# EAGLE board MySens-easyRS485-Maple-V01-008 (EAGLE 7.6.0)
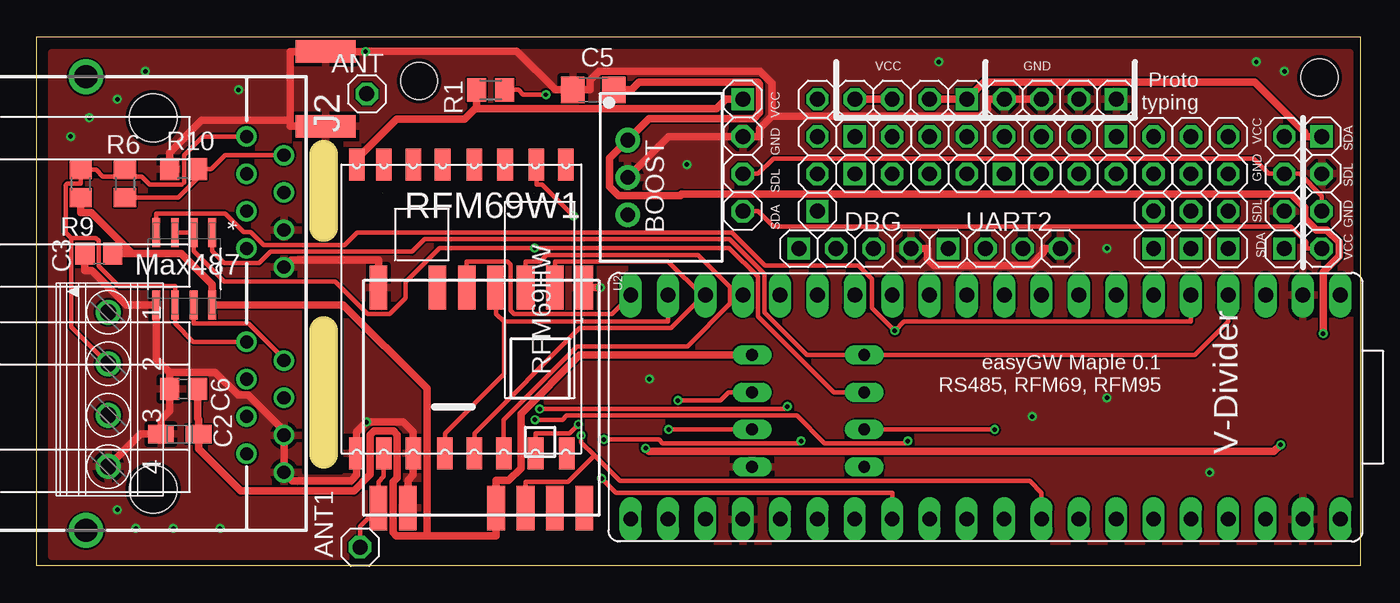
[diagram p0: board, top side]
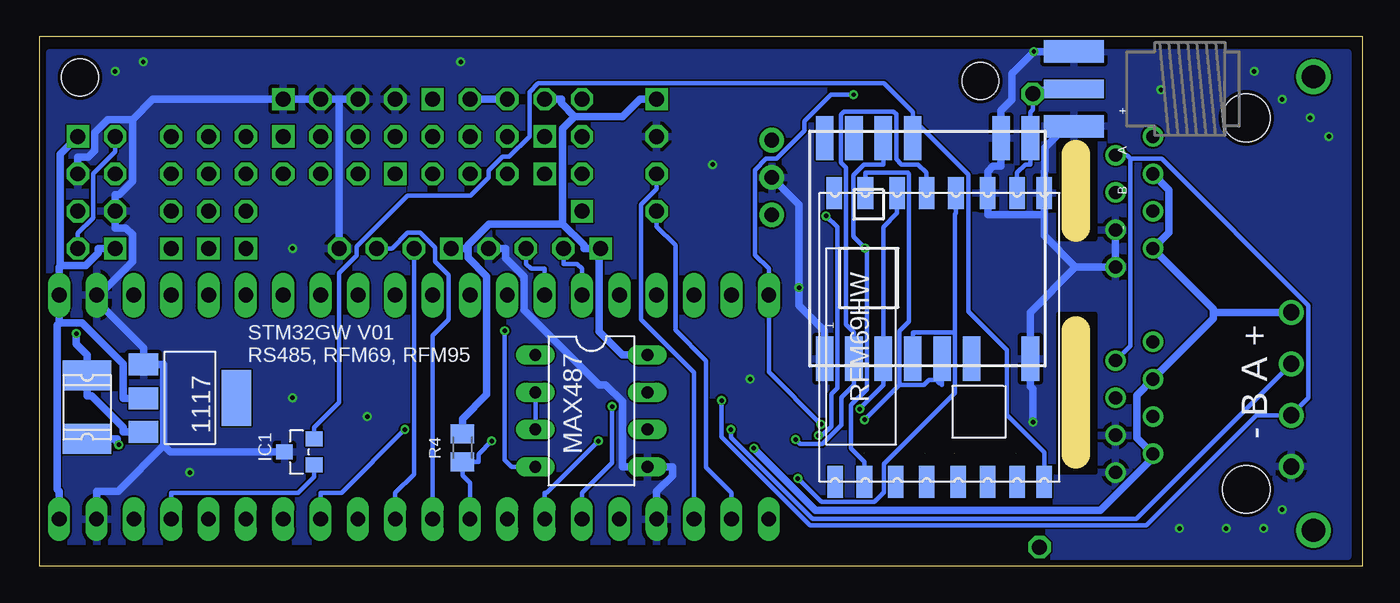
[diagram p1: board, bottom side, seen from below]

Size 90 x 36 mm. Coordinates in mm from the lower left corner, seen from the top.
Outline: 90,0 0,0 0,36 90,36 90,0
Copper layers (1*16): Top 0.035mm / dielectric 1.5mm / Bottom 0.035mm
Design rules "dirt_cheap_dirty_boards.v1": minimum track width 5mil, minimum drill 12mil, track to track 5mil, track to pad 5mil, pad to pad 5mil, via to via 5mil, smd to smd 0mil, copper to edge 10mil, drill to drill 10mil, minimum pad ring 10mil, minimum via ring 6mil, stop-mask expansion 2mil, vias tented up to drill 25mil, thermal gap 10mil
Net classes: 0 default: width 0.305 mm; 1 Power: width 0.508 mm
Holes 2.5 mm at 87.24,33.23 26,33
tRestrict: area 18.2,22.2 to 20.7,28.6; area 18.2,6.3 to 20.7,17.1; area 23.9,0.6 to 89.9,1.3; 1 lines
bRestrict: area 18.2,22.2 to 20.7,28.6; area 18.2,6.3 to 20.7,17.1; area 23.9,0.6 to 89.9,1.3
Milling: 2 lines

## Footprints (pad centres in the part's own frame; a part is rotated, then mirrored left to right if it is on the bottom)
SOT223 = smd 1.499 x 2.007: 1 -2.261,-3.15; 2 0.025,-3.15; 3 2.311,-3.15 | smd 3.81 x 2.007: 4 0,3.15
1X01 = drill 1.016 octagon: 1 0,0
SIP3 = drill 1 pad 1.676: 1 -2.54,0; 2 0,0; 3 2.54,0
R/2012-12W = smd 1.75 x 1.26: + 1.275,0; - -1.275,0
C0805 = smd 1.3 x 1.5: 1 -0.95,0; 2 0.95,0
C1206 = smd 1.6 x 1.8: 1 -1.4,0; 2 1.4,0
1X04-S = drill 1.016 square: 1 -3.81,0 | drill 1.016 octagon: 2 -1.27,0; 3 1.27,0; 4 3.81,0
1812L = smd 2.03 x 3.3: P$1 -2.16,0; P$2 2.16,0
SOT23 = smd 1.016 x 1.143: 1 -0.889,-1.016; 2 0.889,-1.016; 3 0,1.016
557570-1 = drill 0.889: 1-1 -11.43,6.35; 1-2 -10.16,8.89; 1-3 -8.89,6.35; 1-4 -7.62,8.89; 1-5 -6.35,6.35; 1-6 -5.08,8.89; 1-7 -3.81,6.35; 1-8 -2.54,8.89; 2-1 2.54,6.35; 2-2 3.81,8.89; 2-3 5.08,6.35; 2-4 6.35,8.89; 2-5 7.62,6.35; 2-6 8.89,8.89; 2-7 10.16,6.35; 2-8 11.43,8.89 | drill 1.575 pad 2.184: G1 -15.494,-4.572; G3 15.367,-4.572 | hole 3.251: -12.7,0; 12.573,0
DIL08 = drill 0.813 long: 1 -3.81,-3.81; 2 -1.27,-3.81; 3 1.27,-3.81; 4 3.81,-3.81; 5 3.81,3.81; 6 1.27,3.81; 7 -1.27,3.81; 8 -3.81,3.81
M0805 = smd 1.3 x 1.6: 1 -0.95,0; 2 0.95,0
R0805 = smd 1.3 x 1.5: 1 -0.95,0; 2 0.95,0
RFM = smd 2.184 x 1.067: ANT 19.651,2.889; DIO0 0,13.27; DIO1 0,11.143; DIO2 0,9.047; DIO3 0,6.889; DIO4 0,4.889; DIO5 0,2.889; GNDA 19.651,4.889; GNDB 19.651,1.048; MISO 19.651,9.047; MOSI 19.651,11.047; NC 19.651,15.334; NSS 19.651,13.206; RESET 0,15.27; SCK 19.651,7.048; VCC 0,1.048
SOIC127P600X175-8N = smd 1.981 x 0.533: 1 -2.464,1.905; 2 -2.464,0.635; 3 -2.464,-0.635; 4 -2.464,-1.905; 5 2.464,-1.905; 6 2.464,-0.635; 7 2.464,0.635; 8 2.464,1.905
RFM69HCW-XXXS2 = smd 3 x 1.2: 3.3V 7.5,1; ANT 7.5,-7; DIO0 7.5,3; DIO1 7.5,5; DIO2 7.5,7; GND_1 7.5,-5; GND_2 -7.5,-7; GND_3 -7.5,7; MISO -7.5,5; MOSI -7.5,3; NSS -7.5,-1; RESET -7.5,-3; SCK -7.5,1
20-DIP = drill 1.016 pad 1.27 long: 1 -24.13,-7.62; 2 -21.59,-7.62; 3 -19.05,-7.62; 4 -16.51,-7.62; 5 -13.97,-7.62; 6 -11.43,-7.62; 7 -8.89,-7.62; 8 -6.35,-7.62; 9 -3.81,-7.62; 10 -1.27,-7.62; 11 1.27,-7.62; 12 3.81,-7.62; 13 6.35,-7.62; 14 8.89,-7.62; 15 11.43,-7.62; 16 13.97,-7.62; 17 16.51,-7.62; 18 19.05,-7.62; 19 21.59,-7.62; 20 24.13,-7.62 | drill 1 pad 1.27 long: 21 24.13,7.62; 22 21.59,7.62; 23 19.05,7.62; 24 16.51,7.62; 25 13.97,7.62; 26 11.43,7.62; 27 8.89,7.62; 28 6.35,7.62; 29 3.81,7.62; 30 1.27,7.62; 31 -1.27,7.62; 32 -3.81,7.62; 33 -6.35,7.62; 34 -8.89,7.62; 35 -11.43,7.62; 36 -13.97,7.62; 37 -16.51,7.62; 38 -19.05,7.62; 39 -21.59,7.62; 40 -24.13,7.62
SMA_EDGELAUNCH = smd 4.064 x 1.524: GND@1 2.032,-2.54; GND@2 2.032,2.54 | smd 4.064 x 1.524 bottom: GND@3 2.032,2.54; GND@4 2.032,-2.54 | smd 4.064 x 1.27: P 2.032,0
1751264 = drill 1.1 pad 1.7: 1 -5.25,-0.1; 2 -1.75,-0.1; 3 1.75,-0.1; 4 5.25,-0.1

## Placement (x,y rotation side)
1117  REG1117  [SOT223]  79.77,11.43 270 bottom
ANT  [1X01]  22.45,32.12 0 top
ANT1  [1X01]  21.98,1.27 0 top
BOOST  R-78C1.8-1.0  [SIP3]  40.19,26.43 270 top
C2  10uF  [R/2012-12W]  9.73,8.96 0 top
C3  22p  [C0805]  4.22,21.23 0 top
C5  0.1uF  [C1206]  37.86,32.38 180 top
C6  22pF  [C0805]  9.98,12.04 180 top
DBG  [1X04-S]  55.64,21.59 0 top
F1  1812L  [1812L]  86.75,10.79 90 bottom
IC1  ATSHA204A  [SOT23]  72.33,7.75 90 bottom
J2  [557570-1]  7.92,17.78 270 top
JP1  [1X04-S]  69.61,31.75 180 top
JP2  [1X04-S]  84.85,25.4 90 top
JP3  [1X04-S]  59.45,31.75 180 top
JP4  [1X04-S]  69.61,29.21 180 top
JP5  [1X04-S]  48.02,27.94 270 top
JP6  [1X04-S]  59.45,26.67 0 top
JP7  [1X04-S]  69.61,26.67 0 top
JP8  [1X04-S]  75.96,25.4 90 top
JP9  [1X04-S]  78.5,25.4 90 top
JP10  [1X04-S]  87.39,25.4 270 top
JP11  [1X04-S]  53.1,27.94 90 top
JP12  [1X04-S]  81.04,25.4 90 top
JP15  [1X04-S]  59.45,29.21 0 top
MAX487  MAX481CPA  [DIL08]  52.47,10.54 270 bottom
R1  10k  [M0805]  30.88,32.38 180 top
R4  10k  [M0805]  61.23,8.03 90 bottom
R6  150R  [R0805]  6,26 270 top
R9  330R  [R0805]  3,26 90 top
R10  330R  [R0805]  10,27 180 top
RFM69W  RFM69HW  [RFM]  20.62,5.71 90 bottom
RFM69W1  RFM69HW  [RFM]  20.71,27.3 270 top
RS1  MAX487ECSA+  [SOIC127P600X175-8N]  10.04,20.22 270 top
U1  RFM69HCW  [RFM69HCW-XXXS2]  29.61,21.59 90 bottom
U2  RFM69HCW  [RFM69HCW-XXXS2]  30.24,11.43 270 top
U$2  MAPLEMINI  [20-DIP]  64.53,10.79 180 top
UART2  [1X04-S]  65.8,21.59 0 top
X2  [SMA_EDGELAUNCH]  17.62,32.45 180 bottom
X3  1751264  [1751264]  4.96,12 270 top

## Library data of the parts
1117 = burr-brown; MPN: REG1117; OC_FARNELL: 1097566; OC_NEWARK: 14P6981
ANT ANT1 = pinhead
BOOST = dc-dc-converter
C2 C3 C5 C6 R1 R4 R6 R9 R10 = rcl
DBG JP1-JP12 JP15 UART2 = pinhead-2
F1 = ptc-littlefuse
IC1 = Sensor
J2 = con-amp
MAX487 = maxim-4
RFM69W RFM69W1 = hoperf
RS1 = Maxim_By_element14_Batch_1; MPN: MAX487ECSA+; OC_FARNELL: 9724532; OC_NEWARK: 68K4803; PACKAGE: SOIC-8; SUPPLIER: Maxim
U1 U2 = doug
U$2 = maplemini-small
X2 = adafruit
X3 = con-phoenix-350; MPN: 1751264; OC_FARNELL: unknown; OC_NEWARK: 10R0934

## Nets
3V3: IC1.2 RFM69W.VCC U1.3.3V
+5V [Power]: U$2.21
A: J2.1-1 J2.2-1 MAX487.6 R6.1 R9.2 RS1.6 X3.2
ANT: ANT.1 RFM69W.ANT U1.ANT X2.P
ANT1: ANT1.1 RFM69W1.ANT U2.ANT
B: J2.1-2 J2.2-2 MAX487.7 R6.2 R10.1 RS1.7 X3.3
B6_TX: MAX487.4 RS1.4 U$2.5
B7_RX: MAX487.1 RS1.1 U$2.4
CC_CS1: U$2.35
CC_CS3: U$2.25
CC_IN_1: U$2.7
CC_OUT_1: U$2.6
CC_OUT_2: U$2.36
CSN: R4.1 RFM69W.NSS U1.NSS U$2.29
CSN2: R1.1 RFM69W1.NSS U2.NSS U$2.20
GND [Power]: 1117.1 BOOST.2 C2.- C3.1 C5.2 C6.2 DBG.4 IC1.3 J2.1-6 J2.1-8 J2.2-6 J2.2-8 JP1.1 JP1.2 JP1.3 JP1.4 JP2.2 JP5.2 JP10.2 MAX487.5 R10.2 RFM69W1.GNDA RFM69W1.GNDB RFM69W.GNDA RFM69W.GNDB RS1.5 U1.GND_1 U1.GND_2 U1.GND_3 U2.GND_1 U2.GND_2 U2.GND_3 U$2.2 U$2.24 U$2.39 UART2.4 X2.GND@1 X2.GND@2 X2.GND@3 X2.GND@4 X3.4
IN [Power]: F1.P$1 J2.1-3 J2.1-7 J2.2-3 J2.2-7 X3.1
IRQ: MAX487.2 MAX487.3 RFM69W.DIO0 RS1.2 RS1.3 U1.DIO0 U$2.33
IRQ2: RFM69W1.DIO0 U2.DIO0 U$2.32
MISO: RFM69W.MISO U1.MISO U$2.27
MISO2: RFM69W1.MISO U2.MISO U$2.18
MOSI: RFM69W.MOSI U1.MOSI U$2.26
MOSI2: RFM69W1.MOSI U2.MOSI U$2.17
N$1: U1.RESET
N$2: J2.1-4
N$3: J2.1-5
N$4: U2.DIO2
N$6: J2.2-4
N$7: J2.2-5
N$8: U2.DIO1
N$9: U2.RESET
N$14: U1.DIO2
N$15: U1.DIO1
NRESET: U$2.34
OUT [Power]: BOOST.3
PC13: IC1.1 U$2.37
RX-MAPLE: U$2.30 UART2.3
RX_DBG: DBG.3 U$2.14
SCK: RFM69W.SCK U1.SCK U$2.28
SCK2: RFM69W1.SCK U2.SCK U$2.19
SCL: JP2.3 JP5.3 JP10.3 U$2.23
SDA: JP2.4 JP5.4 JP10.4 U$2.22
SWCLK/TCK: U$2.10
SWDIO/TMS: U$2.11
SWO/TDO: U$2.8
TDI: U$2.9
TX-MAPLE: U$2.31 UART2.2
TX_DBG: DBG.2 U$2.15
VCC [Power]: 1117.2 C2.+ C3.2 C6.1 DBG.1 JP2.1 JP3.1 JP3.2 JP3.3 JP3.4 JP5.1 JP10.1 MAX487.8 R1.2 R4.2 R9.1 RFM69W1.VCC RS1.8 U2.3.3V U$2.1 U$2.40 UART2.1
VIN [Power]: 1117.3 BOOST.1 C5.1 F1.P$2
WIZ_RST: U$2.16

## Tracks (layer width: path | path; a pad name or v marks a point on that pad's centre or on a via)
3V3
  Bottom 0.305: RFM69W.VCC 21.67,7.73 24.2,10.27 24.2,14.69 26.83,17.31 26.83,26.63 30.18,29.98 30.61,29.98 | 30.61,29.98 30.61,30.87 32.56,32.82 56.08,32.82 56.68,32.22 56.68,29.21 58.06,27.83 58.49,27.83 59.45,26.88 59.45,26.41 60.68,25.18 64.96,25.18 68.43,21.71 68.43,21.11 69.61,19.93 69.61,11.12 71.31,9.42 IC1.2 | U1.3.3V 30.61,29.98
A  (via drill 0.3 pad 0.61)
  Top 0.305: 2.34,22.32 1.97,22.69 1.97,25.92 2.07,26.02 3,26.02 R9.2 4.03,26.95 4.49,26.48 6,26.48 | X3.2 2.34,16.27 2.34,22.32 | 2.34,22.32 4.02,22.32 4.21,22.13 4.21,20.41 5.59,19.03 9.4,19.03 RS1.6 9.4,16.49 10.65,15.24 J2.2-1 | v42.98,9.27 47.05,9.27 MAX487.6 | J2.1-1 11.29,29.21 10.02,27.94 10.02,26.07 9.87,25.92 7.68,25.92 7.12,26.48 6,26.48 | R6.1 6,26.48
  Bottom 0.305: X3.2 15.41,3.2 37.43,3.2 42.98,8.75 v42.98,9.27
ANT  (1 unrouted)
  Bottom 0.305: RFM69W.ANT 23.51,26.74 22.94,27.31 22.61,27.31 U1.ANT 22.61,30.87 22.45,31.03 ANT.1 22.3,32.12 21.96,32.45 X2.P
ANT1  (1 unrouted)
  Top 0.305: ANT1.1 21.98,2.67 U2.ANT 23.24,5.71 23.6,6.07 RFM69W1.ANT
B  (via drill 0.3 pad 0.61)
  Top 0.305: v43.61,11.25 46.49,11.25 47.05,11.81 MAX487.7 | J2.2-2 16.81,14.09 14.41,16.49 10.67,16.49 RS1.7 | 11.56,27 9.61,25.05 R6.2 | 11.56,27 11.88,27 12.82,27.94 J2.1-2 | R10.1 11.56,27
  Bottom 0.305: 15.82,27.7 15.82,14.96 J2.2-2 | J2.1-2 16.06,27.94 15.82,27.7 | 15.82,27.7 13.67,27.7 3.69,17.72 3.69,11.42 X3.3 7.23,10.25 14.72,2.76 37.6,2.76 43.61,8.77 v43.61,11.25
B6_TX  (via drill 0.3 pad 0.61)
  Top 0.305: RS1.4 8.13,23.95 12.81,23.95 14.06,22.71 14.54,22.71 15.43,21.81 20.95,21.81 21.8,22.66 47.29,22.66 49.53,20.42 55.9,20.42 56.81,19.51 56.81,17.55 v58.36,16 58.98,16.61 78.5,16.61 U$2.5
  Bottom 0.305: v58.36,16 58.36,7.22 57.88,6.73 MAX487.4
B7_RX
  Top 0.305: RS1.1 11.94,21.41 12.76,20.59 15.12,20.59 15.9,21.38 25.52,21.38 26.38,22.23 47.11,22.23 49.5,19.85 49.5,17.24 52.38,14.35 MAX487.1 56.37,14.35 57.88,14.35 78.78,14.35 81.04,16.61 U$2.4
CSN  (via drill 0.3 pad 0.61)  (1 unrouted)
  Top 0.305: v59.25,8.49 59.09,8.33 53.59,8.33 51.69,10.22 36.03,10.22 35.75,9.94 v33.89,9.94
  Bottom 0.305: 31.51,12.31 29.83,12.31 29.5,12.65 29.01,12.65 28.79,12.42 28.74,12.42 28.63,12.31 28.61,12.31 U1.NSS | v33.89,9.94 31.52,12.31 31.51,12.31 | 31.51,12.31 31.51,15.96 30.85,16.62 30.85,26.65 30.94,26.74 33.83,26.74 RFM69W.NSS | v59.25,8.49 60.15,7.58 60.15,7.08 R4.1 61.23,6.15 60.72,5.64 60.72,4.38 U$2.29
CSN2  (via drill 0.3 pad 0.61)  (1 unrouted)
  Top 0.305: v36.84,9.63 36.24,9.03 33.92,9.03 RFM69W1.NSS | v34.63,32.06 33.08,32.06 32.75,32.38 R1.1 | U2.NSS 29.24,20.71 32.02,20.71 32.24,20.49 32.24,17.38 32.47,17.15 39.14,17.15 U$2.20
  Bottom 0.305: v36.84,9.63 40.4,13.19 40.4,16.61 U$2.20 40.4,20.22 41.34,21.16 41.34,26.93 40.58,27.7 39.88,27.7 37.96,29.61 37.96,30.26 36.16,32.06 v34.63,32.06
GND  (via drill 0.3 pad 0.61)
  Top 0.508: 9.04,13.17 8.13,14.07 RS1.5 6.1,17.76 3.75,20.1 3.28,20.1 C3.1 | 9.04,13.17 12.15,13.17 13.7,11.62 14.37,11.62 16.81,9.18 J2.2-6 J2.2-8 17.37,5.79 21.37,5.79 21.76,6.18 RFM69W1.GNDB 21.76,9.13 v22.42,9.79 22.44,9.8 24.93,9.8 25.6,9.13 RFM69W1.GNDA 25.6,6.18 25.24,5.82 U2.GND_1 | U2.GND_2 23.24,20.81 17.3,20.81 J2.1-8 | 9.04,13.17 C6.2 9.04,11.63 9.04,10.9 9.04,10.56 8.46,9.98 C2.- 7.08,8.96 X3.4 | DBG.4 60.59,21.59 60.59,20.86 61.01,20.45 67.61,20.45 68.47,21.3 68.47,21.59 UART2.4 | BOOST.2 42.98,29.21 JP5.2 49.16,29.21 49.16,29.75 50.02,30.61 | 17.24,30.31 17.24,29.91 X2.GND@2 | 17.24,30.31 17.24,34.99 X2.GND@1 v22.37,34.99 22.4,35.02 32.64,35.02 35.28,32.38 C5.2 37.64,32.38 37.64,33.05 38.26,33.67 49.18,33.67 50.02,32.83 50.02,30.61 | 17.24,30.31 11.23,30.31 9.05,28.13 R10.2 | U2.GND_3 v38.34,18.93 | JP1.3 JP1.4 64.66,31.75 64.66,31.04 64.23,30.61 50.02,30.61
  Bottom 0.508: v22.42,9.79 22.42,12.03 22.61,12.21 U1.GND_2 22.61,17.24 19.53,20.32 | 19.53,20.32 J2.1-8 J2.1-6 | 21.67,23.89 21.67,22.46 19.53,20.32 | 21.67,23.89 21.67,24.05 RFM69W.GNDB 21.67,26.84 21.62,26.88 21.62,28.44 20.15,29.91 X2.GND@2 | 21.67,23.89 25.51,23.89 RFM69W.GNDA 25.51,26.1 25.51,26.84 25.14,27.21 24.61,27.21 U1.GND_1 24.61,30.97 23.87,31.71 23.87,33.49 v22.37,34.99 X2.GND@1 | DBG.4 58.31,21.59 58.31,20.95 57.04,19.68 57.04,17.4 51.95,12.32 51.5,12.32 50.36,11.17 50.36,6.73 MAX487.5 46.95,6.73 46.95,6.13 48.02,5.06 U$2.24 | 81.53,8.19 81.53,13.69 1117.1 82.92,14.82 85.85,17.75 85.85,18.41 | 81.53,8.19 84.66,5.06 86.12,5.06 U$2.39 | IC1.3 81.09,7.75 81.53,8.19 | 85.85,18.41 85.85,18.53 83.67,20.7 83.67,22.53 84.14,22.99 84.85,22.99 JP2.2 84.85,25.27 84.56,25.27 83.67,26.16 83.67,30.36 | 85.85,18.41 U$2.2 | 69.61,31.75 JP1.2 JP1.1 82.28,31.75 83.67,30.36 | JP1.3 69.61,31.75 | 69.61,31.75 69.61,22.73 UART2.4 | JP10.2 87.39,27.81 86.67,27.81 86.25,28.24 86.25,29.49 85.37,30.36 83.67,30.36 | BOOST.2 38.34,24.57 v38.34,18.93 38.34,17.71 36.61,15.97 U1.GND_3
  other vias: 84.85,33.66 82.94,34.29 61.35,34.29 44.21,27.3 41.67,12.7 12.46,2.54 9.29,2.54 6.74,2.54 5.47,3.81 2.3,29.21 3.57,30.48 5.47,31.75 7.38,33.66 13.73,32.38 79.77,6.35 72.78,11.43 67.7,10.16 72.78,21.59
  pour Bottom: 1.03,34.92 1.03,0.64 89.3,0.64 89.3,34.92
  pour Top: 1.03,0.64 89.3,0.64 89.3,34.92 1.03,34.92
IN  (via drill 0.3 pad 0.61)
  Top 0.508: v84.6,8.24 84.13,7.77 41.64,7.77 v41.41,8
  Bottom 0.508: v41.41,8 41.41,7.95 37.22,3.77 17.86,3.77 14.27,7.36 J2.2-7 15.36,8.71 15.36,11.61 J2.2-3 10.15,16.82 10.15,17.25 | F1.P$1 84.72,8.63 84.72,8.37 v84.6,8.24 | J2.1-3 13.18,25.57 13.18,22.68 J2.1-7 10.15,17.47 10.15,17.25 | 10.15,17.25 X3.1
IRQ  (via drill 0.3 pad 0.61)
  Top 0.305: RS1.3 RS1.2 10.67,21.41 12.74,19.34 20.29,19.34 22.5,17.13 24,17.13 25.09,18.21 25.09,19.31 27.41,21.64 v33.87,21.64 47.1,21.64 49.06,19.67 49.06,16.98 54.23,11.81 54.67,11.81 MAX487.2 | MAX487.3 v65.15,9.27
  Bottom 0.305: RFM69W.DIO0 33.89,7.09 34.8,8 34.8,10.93 33.73,12.01 33.73,21.49 v33.87,21.64 34.65,22.42 34.65,26.6 33.94,27.31 32.61,27.31 U1.DIO0 | MAX487.3 MAX487.2 | v65.15,9.27 69.46,4.96 70.88,4.96 U$2.33
IRQ2  (via drill 0.3 pad 0.61)
  Top 0.305: v36.5,23.81 34.37,25.93 33.98,25.93 RFM69W1.DIO0 | 37.93,7.51 37.02,8.41 v37.02,8.87 | 37.93,7.51 39.67,5.77 67.53,5.77 68.34,4.96 U$2.32 | 37.93,7.51 36.13,5.71 33.24,5.71 U2.DIO0
  Bottom 0.305: v37.02,8.87 36.76,8.87 36.14,9.49 36.14,11.69 35.73,12.11 35.73,23.03 v36.5,23.81
MISO  (via drill 0.3 pad 0.61)  (1 unrouted)
  Top 0.305: v51.98,8.49 51.82,8.33 42.57,8.33 42.31,8.59 v38.57,8.59
  Bottom 0.305: RFM69W.MISO 29.67,26.74 30.24,27.31 31.36,27.31 31.73,27.67 31.73,30.72 31.9,30.9 35.29,30.9 35.49,30.7 35.49,27.44 35.14,27.09 35.14,16.41 34.61,15.87 U1.MISO 34.61,13.2 34.61,12.31 35.45,11.47 35.45,9.58 36.74,8.29 38.27,8.29 v38.57,8.59 | U$2.27 55.64,4.96 55.5,4.96 v51.98,8.49
MISO2  (1 unrouted)
  Top 0.305: 45.3,18.34 43.14,16.18 36.92,16.18 29.76,9.03 RFM69W1.MISO | U$2.18 45.37,18.41 45.3,18.34 | 45.3,18.34 42.94,20.71 35.24,20.71 U2.MISO
MOSI  (via drill 0.3 pad 0.61)  (1 unrouted)
  Top 0.305: v51.05,10.84 50.87,10.66 v34.21,10.66
  Bottom 0.305: RFM69W.MOSI 31.67,24 32.61,23.06 U1.MOSI 32.61,13.2 32.61,12.31 34.21,10.71 v34.21,10.66 | v51.05,10.84 51.05,7.01 53.1,4.96 U$2.26
MOSI2  (1 unrouted)
  Top 0.305: 47.16,18.41 47.16,17.83 44.24,14.91 36.74,14.91 31.76,9.94 31.76,9.03 RFM69W1.MOSI | 47.16,18.41 47.16,18.98 44.98,21.16 34.67,21.16 34.22,20.71 33.24,20.71 U2.MOSI | 47.16,18.41 U$2.17
PC13
  Bottom 0.305: IC1.1 71.31,6.07 72.41,4.96 81.04,4.96 U$2.37
RX-MAPLE
  Bottom 0.305: UART2.3 66.03,21.59 64.96,22.66 64.12,22.66 63.11,21.65 63.11,20.72 62.17,19.78 62.17,16.75 63.26,15.66 U$2.30
RX_DBG
  Bottom 0.305: U$2.14 55.64,20.22 56.58,20.22 56.91,20.55 DBG.3
SCK  (via drill 0.3 pad 0.61)  (1 unrouted)
  Top 0.305: U$2.28 58.18,4.96 39.4,4.96 v38.43,5.94
  Bottom 0.305: 27.73,15.87 27.73,11.77 32.58,6.92 32.58,4.99 33.22,4.34 36.83,4.34 v38.43,5.94 | 27.73,15.87 27.73,23.94 27.67,24 RFM69W.SCK | 27.73,15.87 30.61,15.87 U1.SCK
SCK2  (1 unrouted)
  Top 0.305: U$2.19 42.94,16.61 31.78,16.61 | RFM69W1.SCK 27.76,9.03 31.78,13.04 31.78,16.61 | 31.78,16.61 31.24,17.15 U2.SCK
SCL
  Top 0.305: JP5.3 49.06,26.67 50.1,27.71 82.77,27.71 83.81,26.67 JP2.3 85.89,26.67 87.39,25.17 JP10.3
  Bottom 0.305: U$2.23 45.48,4.96 45.48,13.17 49.07,16.76 49.07,24.57 48.02,25.63 JP5.3
SDA
  Top 0.305: JP10.4 86.35,21.59 86.35,22.02 85.28,23.09 50.1,23.09 49.06,24.13 JP5.4
  Bottom 0.305: U$2.22 42.94,4.96 44.66,6.69 44.66,13.95 46.75,16.03 46.75,21.82 48.02,23.09 JP5.4 | JP10.4 87.39,22.63 86.35,23.67 86.35,26.67 84.85,28.17 JP2.4
TX-MAPLE
  Bottom 0.305: UART2.2 64.53,20.55 64.53,6.23 65.8,4.96 U$2.31
TX_DBG
  Bottom 0.305: DBG.2 54.37,20.55 53.43,20.55 53.1,20.22 U$2.15
VCC
  Top 0.508: 26.54,2.05 24.45,2.05 24.22,2.28 24.22,5.7 24.52,5.99 24.52,8.92 24.27,9.17 22.95,9.17 22.69,8.91 22.69,6.21 21.58,5.1 13.86,5.1 11,7.95 C2.+ 11,9.98 10.93,10.05 10.93,10.9 C6.1 | 26.54,2.05 31.24,2.05 U2.3.3V 31.24,5.81 32.1,5.81 32.92,6.64 32.92,10.35 36.93,14.35 MAX487.8 | RFM69W1.VCC 21.76,27.66 24.49,30.38 29.1,30.38 29.93,31.2 | R1.2 29.93,31.2 | JP5.1 46.88,31.75 46.23,31.1 30.02,31.1 29.93,31.2 | R9.1 3,24.02 3.7,24.02 6.49,21.23 | 6.49,21.23 C3.2 | 6.49,21.23 9.83,21.23 11.94,19.13 RS1.8 | 26.54,2.05 26.54,12.06 20.84,17.76 RS1.8 | RS1.8 | JP10.1 86.25,29.21 86.25,29.5 82.83,32.91 64.42,32.91 JP3.1 JP3.2 | JP3.4 JP3.3
  Bottom 0.508: MAX487.8 50.36,14.35 51.96,15.95 51.96,21.59 | DBG.1 51.96,21.59 | 51.96,21.59 52.05,21.59 52.97,21.59 52.97,21.81 54.41,23.25 | 60.85,21.59 60.85,20.97 59.58,19.7 59.58,11.67 61.23,10.01 R4.2 | 60.85,21.59 60.85,21.82 59.42,23.25 54.41,23.25 | 54.41,23.25 54.41,29.74 53.59,30.56 | 88.58,20.43 88.58,20.4 88.66,20.32 U$2.1 88.66,16.51 | JP10.1 88.58,28.02 88.58,20.43 | 88.58,20.43 86.86,20.43 85.99,21.3 85.99,21.59 JP2.1 | U$2.40 88.66,5.06 88.79,5.19 88.79,16.38 88.66,16.51 | 1117.2 84.3,11.4 84.3,13.73 87.08,16.51 88.66,16.51 | 53.59,30.56 54.5,31.46 54.5,31.75 JP3.4 | 53.59,30.56 50.35,30.56 49.16,31.75 JP5.1 | UART2.1 60.85,21.59 | JP3.2 59.32,31.75 JP3.3
VIN  (via drill 0.3 pad 0.61)
  Top 0.508: v87.5,15.8 87.5,19.99 88.58,21.08 88.58,22.02 87.74,22.86 87.01,22.86 86.25,23.62 86.25,24.37 85.31,25.3 43.87,25.3 43.77,25.21 39.57,25.21 38.97,25.8 38.97,27.74 BOOST.1 41.65,30.43 48.77,30.43 49.16,30.82 49.16,32.77 49.04,32.89 40.95,32.89 40.44,32.38 C5.1
  Bottom 0.508: v87.5,15.8 87.5,15.09 86.75,14.35 F1.P$2 86.75,11.56 86.46,11.56 84.3,9.4 84.3,9.12 1117.3

## Text on the board
tNames: VCC | GND | Proto / typing | VCC | SDA | VCC | GND | SDL | GND | SDL | GND | SDA | SDL | VCC | Max487 | SDA | easyGW Maple 0.1 / RS485, RFM69, RFM95 | V-Divider
bNames: - B A + | STM32GW V01 / RS485, RFM69, RFM95 | - B A +